# Altium PCB Smart_Clock_Mainboard.PcbDoc
Units mil, origin at the board's own origin, x right, y up, seen from the top; angles counter-clockwise.
Board outline 3937.01 x 2559.06 mil, 2 copper layers (Top Layer, Bottom Layer); 76 components, 85 nets, 390 pads, 208 vias.
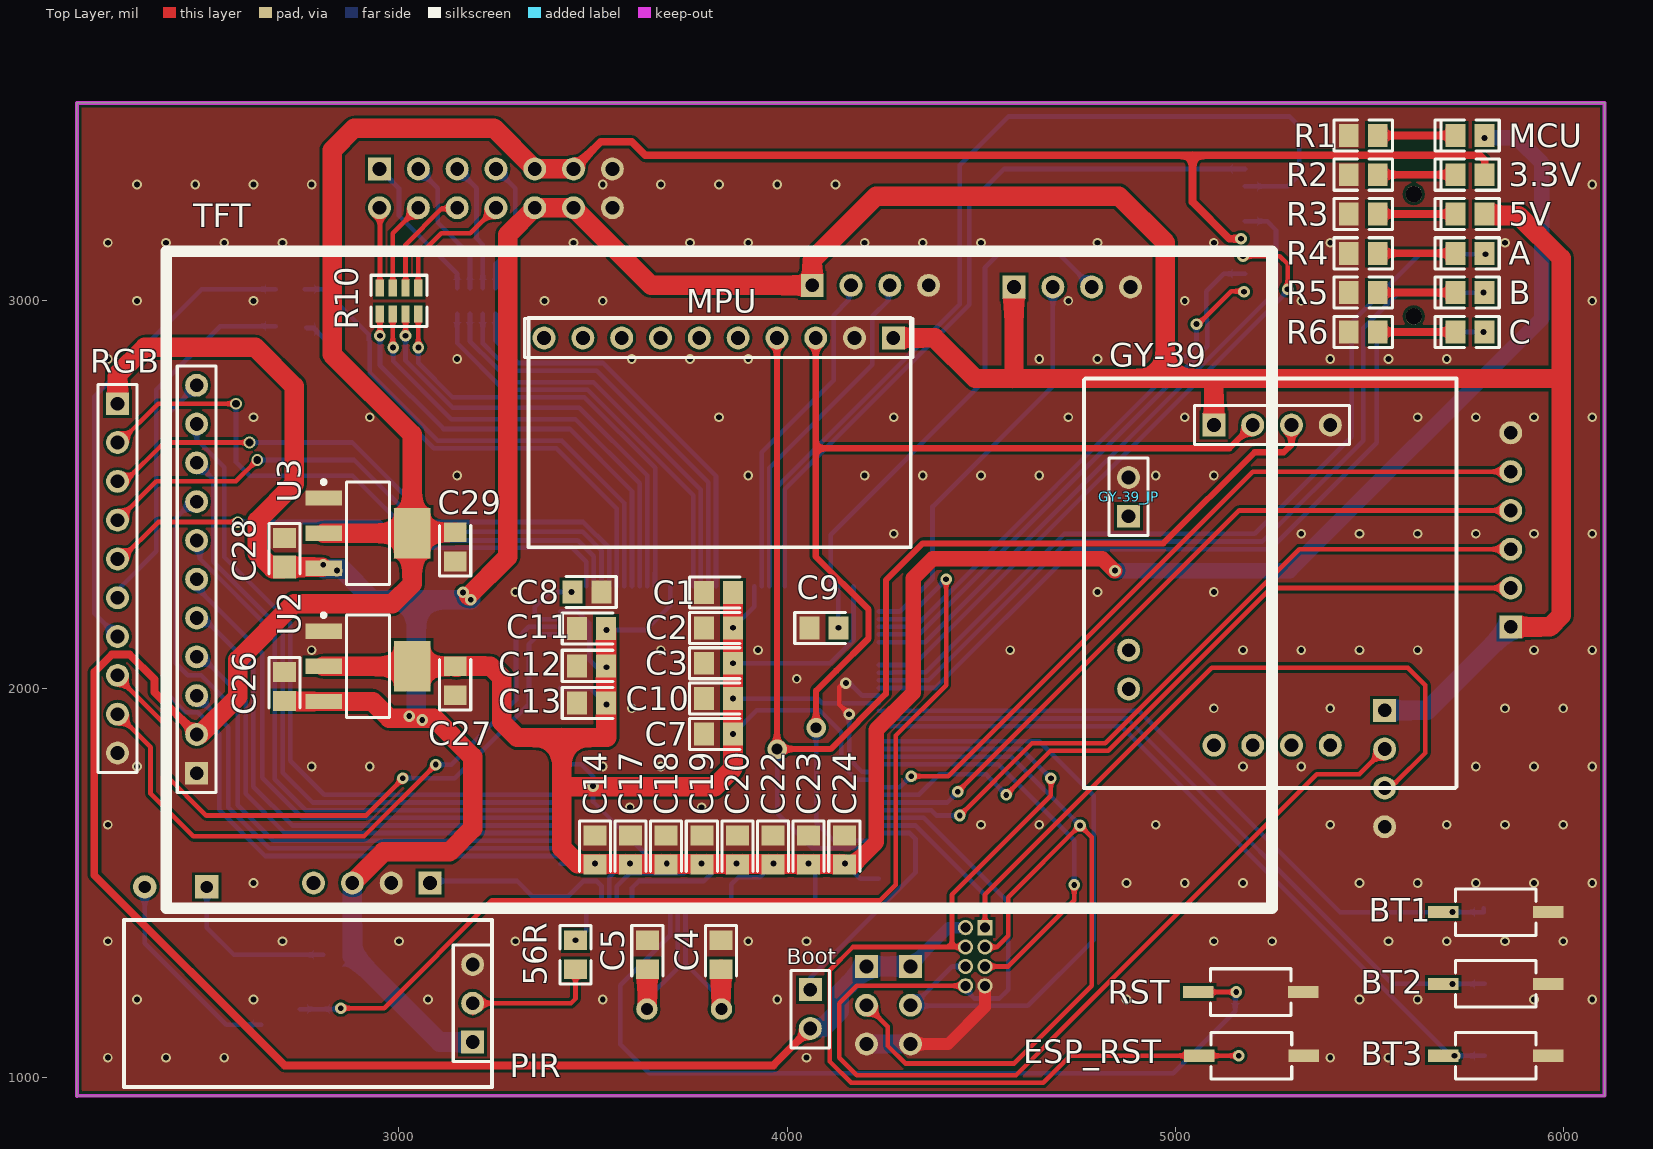
[diagram p0: Top Layer view]
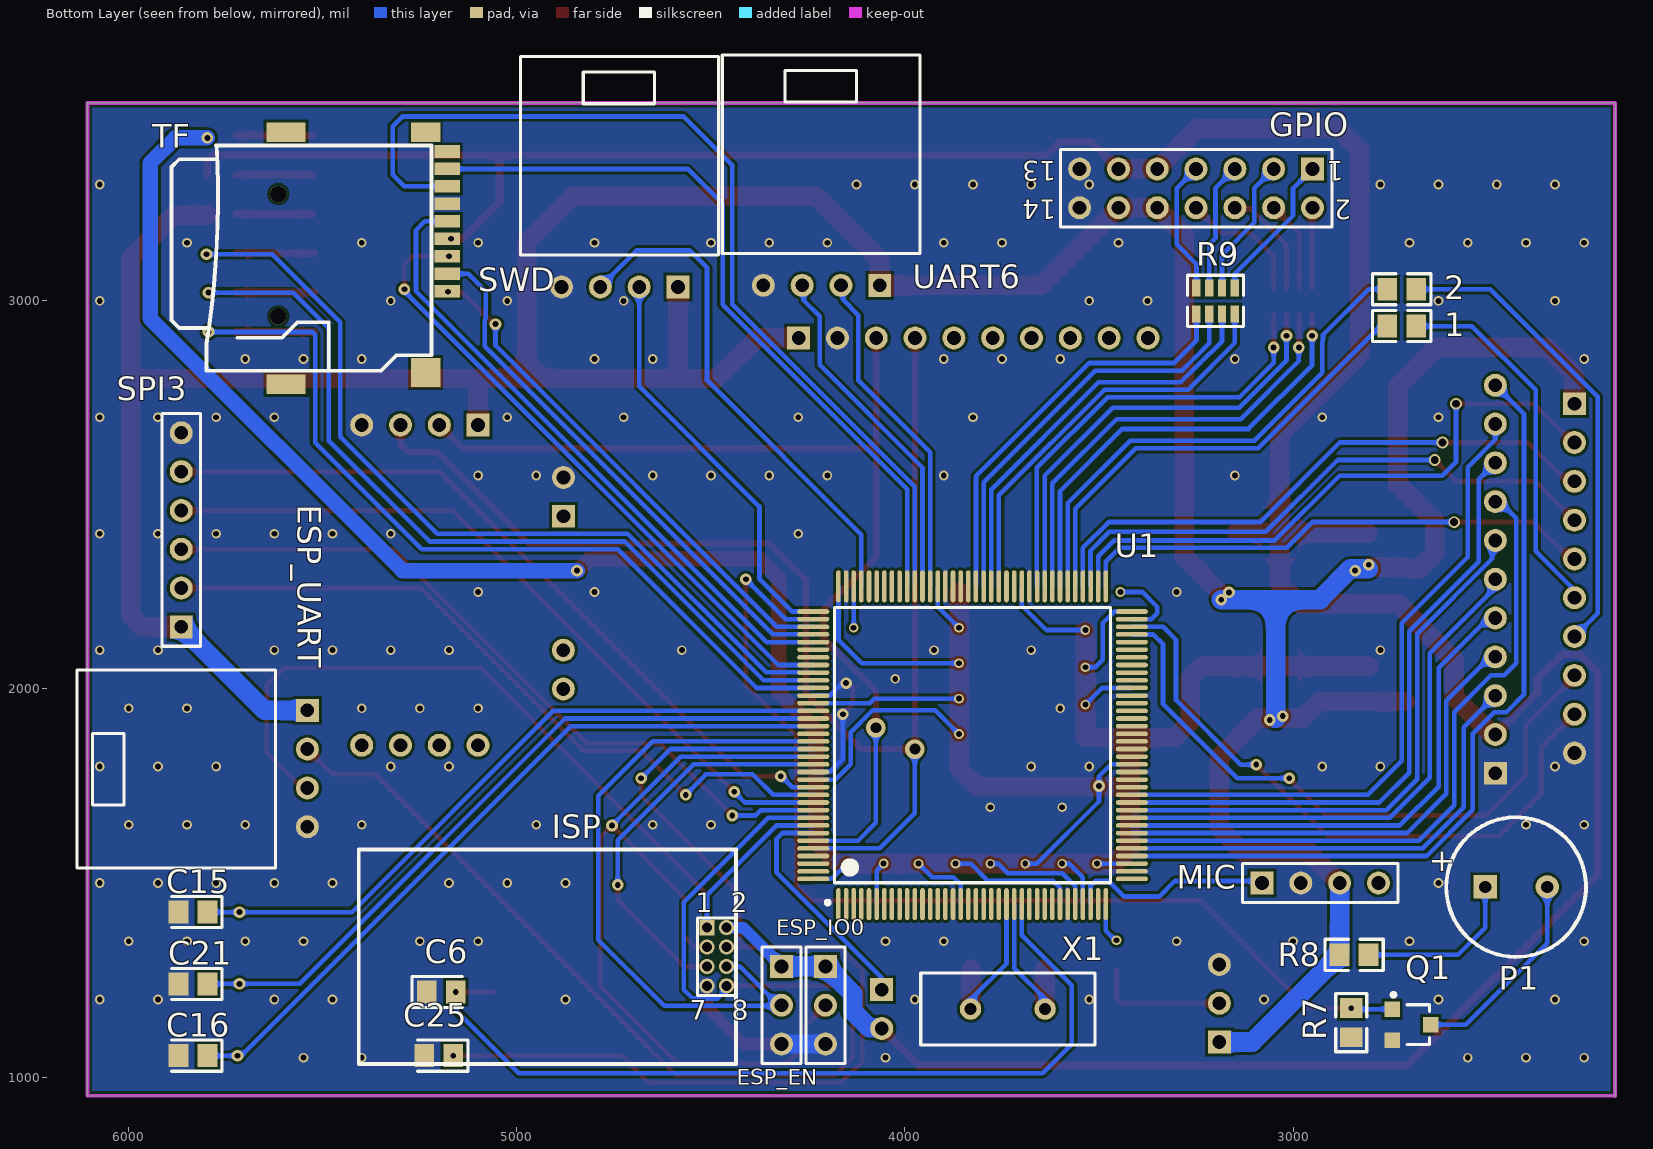
[diagram p1: Bottom Layer view, seen from below]
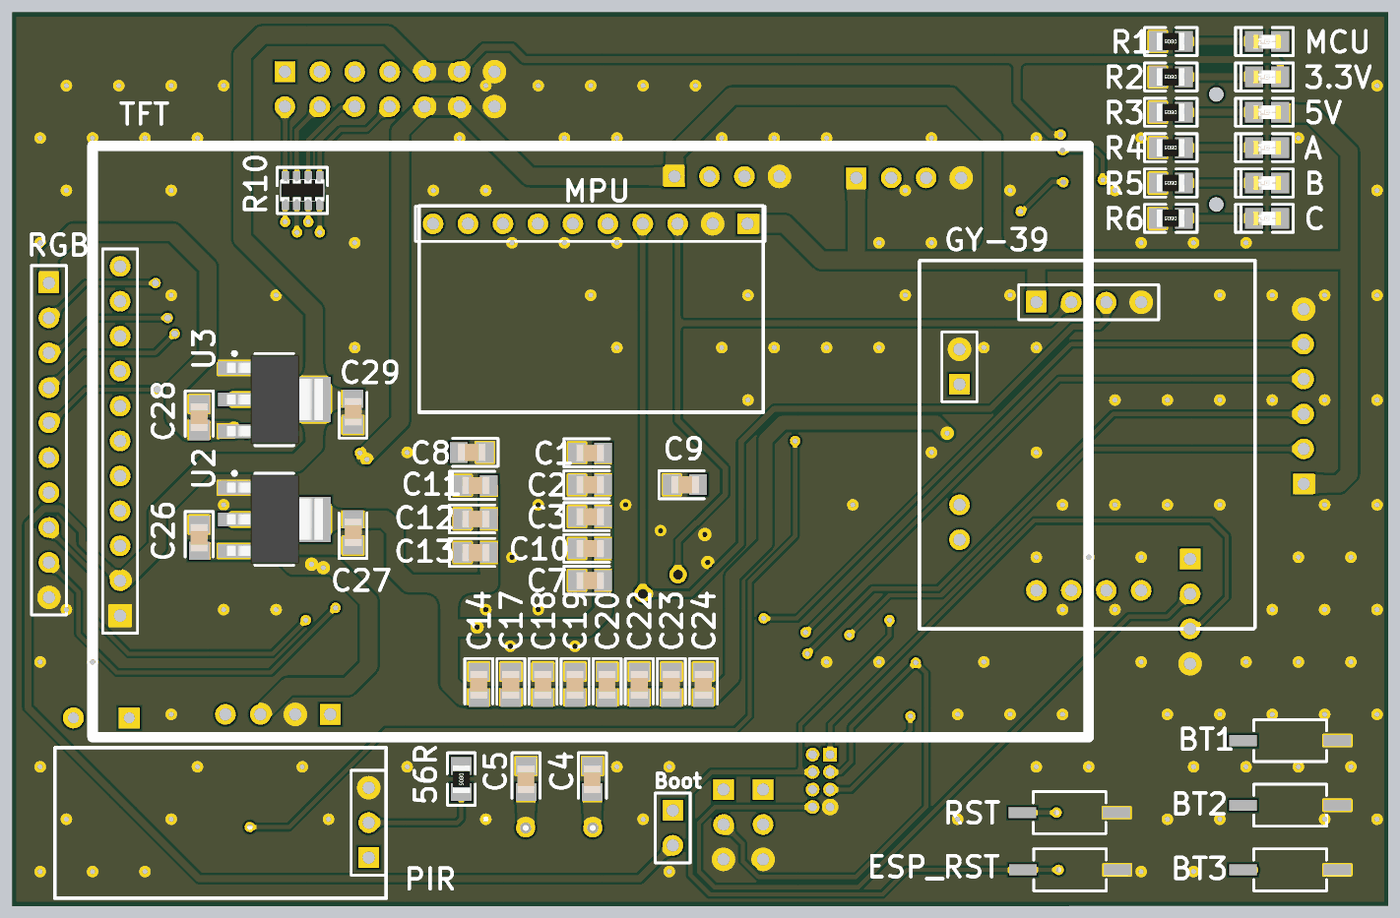
[diagram p2: 3D render of the assembled board from above, using the file's embedded part models]
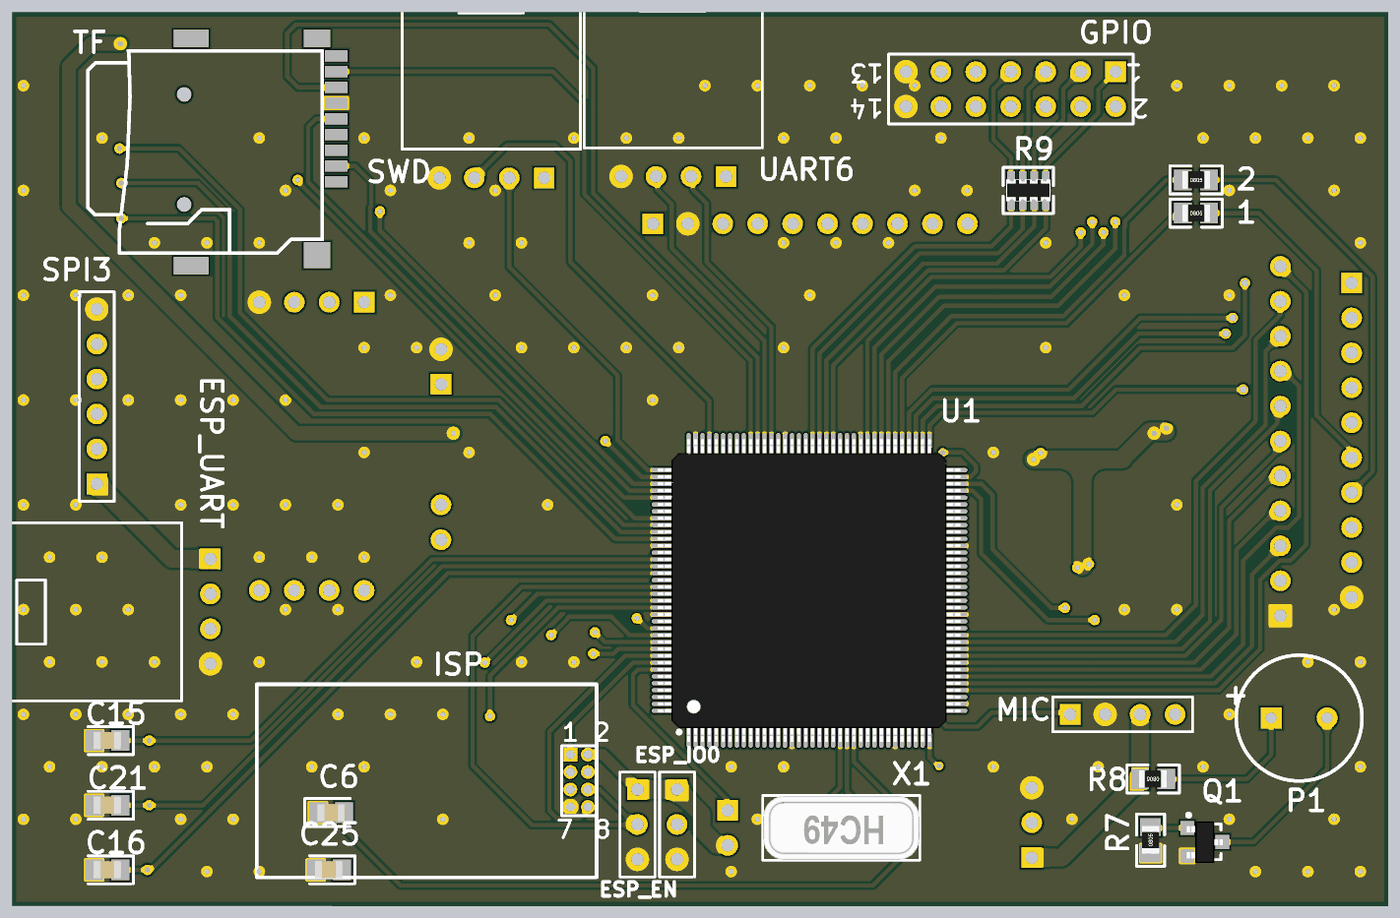
[diagram p3: 3D render of the assembled board from below, using the file's embedded part models]

## Layer stack, top to bottom
Top Solder: solder mask 0.4, Solder Resist, Dk 3.5
Top Layer: signal copper 1.4
Dielectric 1: dielectric 12.6, FR-4, Dk 4.8
Bottom Layer: signal copper 1.4
Bottom Solder: solder mask 0.4, Solder Resist, Dk 3.5

## Board outline
2170,950.94 2170,3510 6107.01,3510 6107.01,951.89

## Design rules (kind name [scope] priority, off if disabled: settings)
AssemblyTestPointUsage [All] p1 off:
AssemblyTestpoint [All] p1 off: testpointundercomponent=TRUE minsize=40 maxsize=100 preferedsize=60 minholesize=0 maxholesize=40 preferedholesize=32 testpointgrid=1 usegrid=TRUE gridtolerance=0.01 allowsidetop=TRUE allowsidebottom=TRUE
Clearance [All] p1: gap=7 ignorepadtopadclearanceinfootprint=FALSE except(0: Arc-Hole Track-Hole SMDPad-Hole THPad-Hole Via-Hole Fill-Hole Poly-Hole Region-Hole Text-Hole)
ComponentClearance [All] p1 off: gap=10 collisioncheckmode=3 verticalgap=10 showdistances=FALSE
DiffPairsRouting [All] p1 off: maxlimit=10 minlimit=10 mostfreqgap=10 toplayer_minwidth=15 toplayer_maxwidth=15 toplayer_prefwidth=15 bottomlayer_minwidth=15 bottomlayer_maxwidth=15 bottomlayer_prefwidth=15 maxuncoupledlength=500
FabricationTestPointUsage [All] p1 off: valid=0 allowmultiple=FALSE
FabricationTestpoint [All] p1 off: side=3 testpointundercomponent=TRUE minsize=40 maxsize=100 preferedsize=60 minholesize=0 maxholesize=40 preferedholesize=32 testpointgrid=1 allowsidetop=TRUE allowsidebottom=TRUE usegrid=TRUE gridtolerance=0.01
FanoutControl Fanout_BGA [IsBGA] p1 off: bgadir=Out bgaviamode=Centered fanoutstyle=Auto fanoutdirection=Alternating viagrid=1 // Fanout_BGA (Default Rule)
FanoutControl Fanout_LCC [IsLCC] p2 off: bgadir=Out bgaviamode=Centered fanoutstyle=Auto fanoutdirection=Alternating viagrid=1 // Fanout_LCC (Default Rule)
FanoutControl Fanout_SOIC [IsSOIC] p3 off: bgadir=Out bgaviamode=Centered fanoutstyle=Auto fanoutdirection=Alternating viagrid=1 // Fanout_SOIC (Default Rule)
FanoutControl Fanout_Small [(CompPinCount < 5)] p4 off: bgadir=Out bgaviamode=Centered fanoutstyle=Auto fanoutdirection=OutThenIn viagrid=1 // Fanout_Small (Default Rule)
FanoutControl Fanout_Default [All] p5 off: bgadir=Out bgaviamode=Centered fanoutstyle=Auto fanoutdirection=Alternating viagrid=1 // Fanout_Default (Default Rule)
Height [All] p1 off: minheight=0 maxheight=1000 prefheight=500
HoleSize [All] p1: absolutevalues=TRUE maxlimit=9999 minlimit=0.5 maxpercent=80.000 minpercent=20.000
HoleToHoleClearance [All] p1 off: gap=10 allowstackedmicrovias=FALSE
LayerPairs [All] p1 off: enforce=TRUE
MinimumSolderMaskSliver [All] p1 off: minsoldermaskwidth=10
NetAntennae [All] p1 off: netantennaetolerance=0
PasteMaskExpansion [All] p1 off: expansion=0
PlaneClearance [All] p1 off: clearance=20
PlaneConnect [All] p1 off: planeconnectstyle=Relief reliefexpansion=20 reliefentries=4 reliefconductorwidth=10 reliefairgap=10
PolygonConnect PolygonConnect_3 [All vs IsNamedPolygon('Top Layer-GND')] p1: connectstyle=Direct reliefconductorwidth=10 reliefentries=4 polygonreliefangle="90 Angle" airgapwidth=10
PolygonConnect PolygonConnect_2 [All vs IsNamedPolygon('Top Layer-GND')] p2: thpad.connectstyle=Direct thpad.reliefconductorwidth=10 thpad.reliefentries=4 thpad.polygonreliefangle="90 Angle" thpad.airgapwidth=0 smdpad.connectstyle=Direct smdpad.reliefconductorwidth=10 smdpad.reliefentries=4 smdpad.polygonreliefangle="90 Angle" smdpad.airgapwidth=10 via.connectstyle=Relief via.reliefconductorwidth=10 via.reliefentries=4 via.polygonreliefangle="90 Angle" via.airgapwidth=10
PolygonConnect PolygonConnect_1 [All vs IsNamedPolygon('Top Layer-GND')] p3: thpad.connectstyle=Direct thpad.reliefconductorwidth=10 thpad.reliefentries=4 thpad.polygonreliefangle="90 Angle" thpad.airgapwidth=10 smdpad.connectstyle=Direct smdpad.reliefconductorwidth=10 smdpad.reliefentries=4 smdpad.polygonreliefangle="90 Angle" smdpad.airgapwidth=10 via.connectstyle=Relief via.reliefconductorwidth=10 via.reliefentries=4 via.polygonreliefangle="90 Angle" via.airgapwidth=10
PolygonConnect [All] p4: connectstyle=Relief reliefconductorwidth=10 reliefentries=4 polygonreliefangle="90 Angle" airgapwidth=10
RoutingCorners [All] p1 off: cornerstyle=45-Degree minsetback=100 maxsetback=100
RoutingLayers [All] p1 off: top layer_v5=TRUE bottom layer_v5=TRUE
RoutingPriority [All] p1 off: routingpriority=0
RoutingTopology [All] p1 off: topology=Shortest
RoutingVias [All] p1 off: holewidth=28 width=50 viastyle="Through Hole" minholewidth=28 minwidth=50 maxholewidth=28 maxwidth=50
SilkToSilkClearance [All] p1 off: silktosilkclearance=10
SilkToSolderMaskClearance [IsPad] p1 off: minsilkscreentomaskgap=10 clearancetoexposedcopper=TRUE
SolderMaskExpansion [All] p1 off: expansion=4
UnRoutedNet [All] p1: checkbadconnections=TRUE
Width [All] p1: maxlimit=9999 minlimit=7 preferedwidth=10 minimp=50.000000 maximp=50.000000 favimp=50.000000
3 further rules are at their usual default settings.

## Components (designator, comment, footprint, x,y, rotation, side; value= is the part's Value field where it differs from the comment)
1 "56R" CR2012-0805 2720,2935 r180 bottom
2 "56R" CR2012-0805 2720,3030 r180 bottom
3.3V "LED" D0805 5760.35,3325.09 r180 top (schematic designator D2)
5V "LED" D0805 5760.35,3223.82 r180 top (schematic designator D3)
56R "Res Semi" CR2012-0805 3455,1315 r270 top
A "LED" D0805 5760.35,3122.55 r180 top (schematic designator D4)
B "LED" D0805 5760.35,3021.27 r180 top (schematic designator D5)
Boot "Boot" HDR1X2 4060,1225 r270 top
BT1 "B1" "PUSH SWITCH 2-PIN" 5826.43,1424.97 r270 top
BT2 "B2" "PUSH SWITCH 2-PIN" 5826.43,1239.97 r270 top
BT3 "B3" "PUSH SWITCH 2-PIN" 5826.43,1054.97 r270 top
C "LED" D0805 5760.35,2920 r180 top (schematic designator D6)
C1 "2.2uF" CC2012-0805#1 3823.39,2248.75 r0 top
C2 "100nF" CC2012-0805#1 3823.39,2157.5 r0 top
C3 "100nF" CC2012-0805#1 3823.39,2066.25 r0 top
C4 "20nF" CC2012-0805#1 3830,1315 r270 top
C5 "20nF" CC2012-0805#1 3640,1315 r270 top
C6 "100nF" CC2012-0805#1 5195,1218.94 r180 bottom
C7 "100nF" CC2012-0805#1 3823.39,1883.75 r0 top
C8 "2.2uF" CC2012-0805#1 3485,2250 r180 top
C9 "2.2uF" CC2012-0805#1 4095,2157.5 r0 top
C10 "100nF" CC2012-0805#1 3823.39,1975 r0 top
C11 "100nF" CC2012-0805#1 3495.82,2155.76 r0 top
C12 "100nF" CC2012-0805#1 3495.82,2059.64 r0 top
C13 "100nF" CC2012-0805#1 3495.82,1963.52 r0 top
C14 "100nF" CC2012-0805#1 3505,1585 r270 top
C15 "100nF" CC2012-0805#1 5835,1425 r0 bottom
C16 "100nF" CC2012-0805#1 5835,1055 r0 bottom
C17 "100nF" CC2012-0805#1 3596.8,1585 r270 top
C18 "100nF" CC2012-0805#1 3688.6,1585 r270 top
C19 "100nF" CC2012-0805#1 3780.4,1585 r270 top
C20 "100nF" CC2012-0805#1 3872.2,1585 r270 top
C21 "100nF" CC2012-0805#1 5835,1240 r0 bottom
C22 "100nF" CC2012-0805#1 3964,1585 r270 top
C23 "100nF" CC2012-0805#1 4055.8,1585 r270 top
C24 "100nF" CC2012-0805#1 4147.6,1585 r270 top
C25 "100nF" CC2012-0805#1 5201.42,1055 r0 bottom
C26 "10uF" CC2012-0805#1 2705,2005.9 r270 top
C27 "10uF" CC2012-0805#1 3145,2021.26 r90 top
C28 "10uF" CC2012-0805#2 2705,2351.26 r270 top
C29 "10uF" CC2012-0805#1 3145,2366.26 r90 top
ESP_EN "ESP_EN" HDR1X3 4318.27,1285 r270 bottom
ESP_IO0 "ESP_IO0" HDR1X3 4205,1285 r270 bottom
ESP_RST "ESP_RST" "PUSH SWITCH 2-PIN" 5196.59,1055 r270 top
ESP_UART "ESP_UART" LOCKEDHDR-4W 5540,1795 r270 bottom
GPIO "ISP" HDR2X7 2949.53,3340.48 r0 bottom
GY-39 "CONN0M" HDR1X4 5100,2680 r0 top
GY-39_JP "MOTOR" HDR1X2 4880.2,2445.11 r90 top
ISP "ISP" HDR1.27_2x4 4510,1385 r180 bottom
MCU "LED" D0805 5760.35,3426.36 r180 top (schematic designator D1)
MIC "Header 4" HDR1X4 3080,1500 r180 bottom
MPU "Header10" HDR1X10 4274,2904.61 r180 top
P1 "Buzzer" BUZ-9.0 2425,1490 r180 bottom
PIR "PIR" HDR1X3 3190,1090 r90 top
Q1 "AO3400" SO-G3/Z3.3 2695,1135 r270 bottom
R1 "330R" CR2012-0805 5485,3426.36 r180 top
R2 "330R" CR2012-0805 5485,3325.09 r180 top
R3 "330R" CR2012-0805 5485,3223.82 r180 top
R4 "330R" CR2012-0805 5485,3122.55 r180 top
R5 "330R" CR2012-0805 5485,3021.27 r180 top
R6 "330R" CR2012-0805 5485,2920 r180 top
R7 "10k" CR2012-0805 2850,1140 r90 bottom
R8 "33R" CR2012-0805 2842.6,1315 r0 bottom
R9 "56R" ARC241-0603x4 3200,3000 r90 bottom
R10 "56R" ARC241-0603x4 3000,3000 r90 top
RGB "Header 10" HDR1X10 2275,2735 r270 top
RST "RESET" "PUSH SWITCH 2-PIN" 5195,1218.94 r90 top
SPI3 "SPI3" HDR1X6 5865,2160 r90 bottom
SWD "Header 4" LOCKEDHDR-4W 4735,3036 r0 bottom
TF "TF CD Socket" SD-502774-0811 5180,3385 r270 bottom
TFT "TFT" HDR1X11 2478.74,1782.68 r90 top
U1 "STM32F407ZET6" LQFP144_M 3825,1855 r90 bottom locked
U2 "LM1117MP-3.3" MP04A_N 2920,2058.3 r0 top
U3 "LM1117MP-3.3" MP04A_N 2920,2401.26 r0 top
UART6 "UART6" LOCKEDHDR-4W 4215,3040 r0 bottom
X1 "8.00MHz" BCY-W2/E4.7 3735,1175.03 r0 bottom

## Footprints (in the part's own frame and the unit in brackets; to place one, negate y for a bottom-side part, rotate by r counter-clockwise, add the part's x,y. Pads: shape width x height; smd on the part's side, far side on the other; paste and mask are expansions set on the pad)
ARC241-0603x4 [mm] "Chip Resistor Array; Body 1.6 x 0.8 x 4 mm (LxW typ)"
  rect 1.1x0.55 smd: 1(-0.864,1.245) 2(0.838,1.245) 3(-0.864,0.406) 4(0.838,0.406) 5(-0.864,-0.432) 6(0.838,-0.432) 7(-0.864,-1.27) 8(0.838,-1.27)
  silkscreen extent -1.68,-1.83 1.68,1.83, body extent -0.79,-1.6 0.81,1.6, height 0.55
BCY-W2/E4.7 [mm]
  round 1.4 hole 0.8: 1(-2.44,-0.002) 2(2.44,-0.002)
  silkscreen extent -5.7,-2.35 5.7,2.35, body extent -5.67,-2.32 5.68,2.33, height 3.6
BUZ-9.0 [mil]
  rect 60x60 hole 31.5: 1(-80,0)
  round 60 hole 31.5: 2(80,0)
  silkscreen extent -180,-180 180,179
CC2012-0805#1 [mm] "Chip Capacitor; Body 2.0 x 1.2 mm (LxW typ)"
  rect 1.3x1.5 smd: 1(-0.95,0) 2(0.95,0)
  silkscreen extent -1.91,-1.02 1.4,1.02, body extent -0.99,-0.64 1.01,0.62, height 0.58
CC2012-0805#2 [mm] "Chip Capacitor; Body 2.0 x 1.2 mm (LxW typ)"
  rect 1.3x1.5 smd: 1(-0.95,0)
  rect 1.5x1.5 smd: 2(0.95,0)
  silkscreen extent -1.91,-1.02 1.4,1.02, body extent -0.99,-0.64 1.01,0.62, height 0.58
CR2012-0805 [mm] "Chip Resistor; Body 2.0 x 1.3 mm (LxW typ)"
  rect 1.3x1.5 smd: 1(-0.95,0) 2(0.95,0)
  silkscreen extent -1.91,-1.02 1.91,1.02, body extent -0.98,-0.62 1.02,0.63, height 0.58
D0805 [mm]
  rect 1.3x1.5 smd: 1(-0.95,0) 2(0.95,0)
  silkscreen extent -1.91,-1.02 2.3,1.02, body extent -0.98,-0.49 1.02,0.51, height 0.48
HDR1.27_2x4 [mm] "DIP Socket (M) 1.27mm"
  rect 1x1 hole 0.65: 1(0,0)
  round 1 hole 0.65: 2(1.27,0) 3(0,-1.27) 4(1.27,-1.27) 5(0,-2.54) 6(1.27,-2.54) 7(0,-3.81) 8(1.27,-3.81)
  silkscreen extent -0.64,-4.44 1.91,0.64
HDR1X2 [mm] "Connector; Header; 3 Position"
  rect 1.5x1.5 hole 0.9: 1(0,0)
  round 1.5 hole 0.9: 2(2.54,0)
  silkscreen extent -1.27,-1.27 3.81,1.27
HDR1X3 [mm] "Connector; Header; 3 Position"
  rect 1.5x1.5 hole 0.9: 1(0,0)
  round 1.5 hole 0.9: 2(2.54,0) 3(5.08,0)
  silkscreen extent -1.27,-1.27 6.35,1.27
HDR1X4 [mm] "Connector; Header; 4 Position"
  rect 1.5x1.5 hole 0.9: 1(0,0)
  round 1.5 hole 0.9: 2(2.54,0) 3(5.08,0) 4(7.62,0)
  silkscreen extent -1.27,-1.27 8.89,1.27
HDR1X6 [mm] "Connector; Header; 4 Position"
  rect 1.5x1.5 hole 0.9: 1(0,0)
  round 1.5 hole 0.9: 2(2.54,0) 3(5.08,0) 4(7.62,0) 5(10.16,0) 6(12.7,0)
  silkscreen extent -1.27,-1.27 13.97,1.27
HDR1X10 [mm] "Connector; Header; 10 Position"
  rect 1.5x1.5 hole 0.9: 1(0,0)
  round 1.5 hole 0.9: 2(2.54,0) 3(5.08,0) 4(7.62,0) 5(10.16,0) 6(12.7,0) 7(15.24,0) 8(17.78,0) 9(20.32,0) 10(22.86,0)
  silkscreen extent -1.27,-1.27 24.13,1.27
HDR1X11 [mm] "Connector; Header; 11 Position"
  rect 1.5x1.5 hole 0.9: 1(0,0)
  round 1.5 hole 0.9: 2(2.54,0) 3(5.08,0) 4(7.62,0) 5(10.16,0) 6(12.7,0) 7(15.24,0) 8(17.78,0) 9(20.32,0) 10(22.86,0) 11(25.4,0)
  silkscreen extent -1.27,-1.27 26.67,1.27
HDR2X7 [mm] "Connector; Header; 4 Position"
  rect 1.5x1.5 hole 0.9: 1(0.012,0.012)
  round 1.5 hole 0.9: 2(0.012,2.552) 3(2.552,0.012) 4(2.552,2.552) 5(5.092,0.012) 6(5.092,2.552) 7(7.632,0.012) 8(7.632,2.552) 9(10.172,0.012) 10(10.172,2.552) 11(12.712,0.012) 12(12.712,2.552) 13(15.252,0.012) 14(15.252,2.552)
  silkscreen extent -1.26,-1.26 16.51,3.82
LOCKEDHDR-4W [mm] "5-pin header with lock"
  rect 1.5x1.5 hole 0.9: 1(-3.81,0)
  round 1.5 hole 0.9: 2(-1.27,0) 3(1.27,0) 4(3.81,0)
  silkscreen extent -6.45,-15.09 6.5,-2.08
LQFP144_M [mm] "Thin QFP, 100-Leads, Body 14x14mm, Pitch 0.5mm, IPC Medium Density"
  oval 2.1x0.3 smd: 1(-10.4,8.8) 2(-10.4,8.3) 3(-10.4,7.8) 4(-10.4,7.3) 5(-10.4,6.8) 6(-10.4,6.3) 7(-10.4,5.8) 8(-10.4,5.3) 9(-10.4,4.8) 10(-10.4,4.3) 11(-10.4,3.8) 12(-10.4,3.3) 13(-10.4,2.8) 14(-10.4,2.3) 15(-10.4,1.8) 16(-10.4,1.3) 17(-10.4,0.8) 18(-10.4,0.3) 19(-10.4,-0.2) 20(-10.4,-0.7) 21(-10.4,-1.2) 22(-10.4,-1.7) 23(-10.4,-2.2) 24(-10.4,-2.7) 25(-10.4,-3.2) 26(-10.4,-3.7) 27(-10.4,-4.2) 28(-10.4,-4.7) 29(-10.4,-5.2) 30(-10.4,-5.7) 31(-10.4,-6.2) 32(-10.4,-6.7) 33(-10.4,-7.2) 34(-10.4,-7.7) 35(-10.4,-8.2) 36(-10.4,-8.7) 73(10.4,-8.7) 74(10.4,-8.2) 75(10.4,-7.7) 76(10.4,-7.2) 77(10.4,-6.7) 78(10.4,-6.2) 79(10.4,-5.7) 80(10.4,-5.2) 81(10.4,-4.7) 82(10.4,-4.2) 83(10.4,-3.7) 84(10.4,-3.2) 85(10.4,-2.7) 86(10.4,-2.2) 87(10.4,-1.7) 88(10.4,-1.2) 89(10.4,-0.7) 90(10.4,-0.2) 91(10.4,0.3) 92(10.4,0.8) 93(10.4,1.3) 94(10.4,1.8) 95(10.4,2.3) 96(10.4,2.8) 97(10.4,3.3) 98(10.4,3.8) 99(10.4,4.3) 100(10.4,4.8) 101(10.4,5.3) 102(10.4,5.8) 103(10.4,6.3) 104(10.4,6.8) 105(10.4,7.3) 106(10.4,7.8) 107(10.4,8.3) 108(10.4,8.8)
  oval 0.3x2.1 smd: 37(-8.75,-10.4) 38(-8.25,-10.4) 39(-7.75,-10.4) 40(-7.25,-10.4) 41(-6.75,-10.4) 42(-6.25,-10.4) 43(-5.75,-10.4) 44(-5.25,-10.4) 45(-4.75,-10.4) 46(-4.25,-10.4) 47(-3.75,-10.4) 48(-3.25,-10.4) 49(-2.75,-10.4) 50(-2.25,-10.4) 51(-1.75,-10.4) 52(-1.25,-10.4) 53(-0.75,-10.4) 54(-0.25,-10.4) 55(0.25,-10.4) 56(0.75,-10.4) 57(1.25,-10.4) 58(1.75,-10.4) 59(2.25,-10.4) 60(2.75,-10.4) 61(3.25,-10.4) 62(3.75,-10.4) 63(4.25,-10.4) 64(4.75,-10.4) 65(5.25,-10.4) 66(5.75,-10.4) 67(6.25,-10.4) 68(6.75,-10.4) 69(7.25,-10.4) 70(7.75,-10.4) 71(8.25,-10.4) 72(8.75,-10.4) 109(8.75,10.45) 110(8.25,10.45) 111(7.75,10.45) 112(7.25,10.45) 113(6.75,10.45) 114(6.25,10.45) 115(5.75,10.45) 116(5.25,10.45) 117(4.75,10.45) 118(4.25,10.45) 119(3.75,10.45) 120(3.25,10.45) 121(2.75,10.45) 122(2.25,10.45) 123(1.75,10.45) 124(1.25,10.45) 125(0.75,10.45) 126(0.25,10.45) 127(-0.25,10.45) 128(-0.75,10.45) 129(-1.25,10.45) 130(-1.75,10.45) 131(-2.25,10.45) 132(-2.75,10.45) 133(-3.25,10.45) 134(-3.75,10.45) 135(-4.25,10.45) 136(-4.75,10.45) 137(-5.25,10.45) 138(-5.75,10.45) 139(-6.25,10.45) 140(-6.75,10.45) 141(-7.25,10.45) 142(-7.75,10.45) 143(-8.25,10.45) 144(-8.75,10.45)
  silkscreen extent -10.42,-9 9,9.63, body extent -11,-10.95 11,11.05, height 1.6
MP04A_N [mm] "SOT223, 4-Leads, Body 6.5x3.5mm, Pitch 2.3mm, Lead Span 7mm, IPC Medium Density"
  rect 2.4x1 smd: 1(-2.9,2.3) 2(-2.9,0) 3(-2.9,-2.3)
  rect 2.4x3.3 smd: 4(2.9,0)
  silkscreen extent -3.02,-3.35 1.4,3.47, body extent -3.43,-3.24 3.53,3.26, height 1.66
"PUSH SWITCH 2-PIN" [mm]
  rect 0.8x2 smd: 1(-0.001,-3.425) 2(-0.001,3.425)
  silkscreen extent -1.52,-2.64 1.52,2.64
SD-502774-0811 [mil] "MOLEX SD Memory Card Connector"
  round 42.5 hole 42.5 unplated: 0(110,-435) 0(425,-435)
  rect 32.5x66 smd: 1(360,0) 2(315,0) 3(270,0) 4(225,0) 5(180,0) 6(135,0) 7(90,0) 8(45,0) 9(0,0)
  rect 50x100 smd: 10(-50,-415) 10(600,-415)
  rect 50x75 smd: 10(-50,-55)
  rect 75x75 smd: 10(570,-55)
  silkscreen extent -15,-710 565,-40
SO-G3/Z3.3 [mil]
  rect 40x40 smd: 1(-40,-50) 2(40,-50) 3(0,50)
  silkscreen extent -82,-51 51,46, body extent -58,-52 60,52, height 43

## Part data
1 2 R1 R2 R3 R4 R5 R6 R7 R8: library part "Res Semi", "Semiconductor Resistor", LatestRevisionDate=17-Jul-2002, LatestRevisionNote="Re-released for DXP Platform.", Published=8-Jun-2000, Publisher="Altium Limited"
3.3V 5V A B C MCU: "Typical RED GaAs LED", LatestRevisionDate=08-Jul-2005, LatestRevisionNote="Mech Layer 1 removed.", PackageReference=LED-1, Published=8-Jun-2000, Publisher="Altium Limited"
56R: "Semiconductor Resistor", LatestRevisionDate=17-Jul-2002, LatestRevisionNote="Re-released for DXP Platform.", Published=8-Jun-2000, Publisher="Altium Limited"
Boot GY-39_JP: library part "Header 2", "Header, 2-Pin", Publisher="Altium Limited", Revision="17-Jul-2002: Re-released for DXP Platform."
BT1 BT2 BT3 ESP_RST RST: library part SW-SPST, "Single-Pole, Single-Throw Switch", Published=24-Mar-1999, Publisher="Altium Limited", Revision="July-2002: Re-released for DXP Platform."
C1 C2 C3 C4 C5 C6 C7 C8 C9 C10 C11 C12 C13 C14 C15 C16 C17 C18 C19 C20 C21 C22 C23 C24 C25 C26 C27 C28 C29: library part "Cap Semi", "Capacitor (Semiconductor SIM Model)", LatestRevisionDate=17-Jul-2002, LatestRevisionNote="Re-released for DXP Platform.", PackageReference=C1206, Published=8-Jun-2000, Publisher="Altium Limited"
ESP_EN ESP_IO0 PIR: library part "Header 3", "Header, 3-Pin", Publisher="Altium Limited", Revision="17-Jul-2002: Re-released for DXP Platform."
ESP_UART GY-39 UART6: library part "Header 4", "Header, 4-Pin", Publisher="Altium Limited", Revision="17-Jul-2002: Re-released for DXP Platform."
GPIO: library part "Header 7X2", "Header, 7-Pin, Dual row", Publisher="Altium Limited", Revision="17-Jul-2002: Re-released for DXP Platform."
ISP: library part "Header 4X2", "Header, 5-Pin, Dual row", Publisher="Altium Limited", Revision="17-Jul-2002: Re-released for DXP Platform."
MIC SWD: "Header, 4-Pin", Publisher="Altium Limited", Revision="17-Jul-2002: Re-released for DXP Platform."
MPU: library part "Header 10", "Header, 10-Pin", LatestRevisionDate=17-Jul-2002, LatestRevisionNote="Re-released for DXP Platform.", Publisher="Altium Limited"
Q1: "N-Channel MOSFET", Published=8-Jun-2000, Publisher="Altium Limited", Revision="July-2002: Re-released for DXP Platform."
R9 R10: library part "Res Array", "4x Resistor Array", LatestRevisionDate=17-Jul-2002, LatestRevisionNote="Re-released for DXP Platform.", Published=8-Jun-2000, Publisher="Altium Limited"
RGB: "Header, 10-Pin", LatestRevisionDate=17-Jul-2002, LatestRevisionNote="Re-released for DXP Platform.", Publisher="Altium Limited"
SPI3: library part "Header 6", "Header, 6-Pin", LatestRevisionDate=17-Jul-2002, LatestRevisionNote="Re-released for DXP Platform.", Publisher="Altium Limited"
TF: "TF Card Socket with Spring with Card Detection"
TFT: library part "Header 11", "Header, 11-Pin", LatestRevisionDate=17-Jul-2002, LatestRevisionNote="Re-released for DXP Platform.", Publisher="Altium Limited"
U1: "STM32 ARM-based 32-bit MCU with 64 Kbytes Flash, 144-pin LQFP, Industrial Temperature", ComponentLink1Description="Manufacturer Link", ComponentLink1URL=www.st.com/stm32, ComponentLink2Description=Datasheet, ComponentLink2URL=http://www.st.com/stonline/products/literature/ds/13587.pdf, DatasheetVersion="rev6, Mar-2008", PackageDescription="100-Pin Low-Profile Quad Flat Pack, 14 x 14 mm Body, 0.5 mm Pitch (LQFP100)", PackageReference=LQFP100, PackageVersion=Mar-2008, Published=30-May-2008, Publisher="Altium Limited"
U2 U3: "800mA Low-Dropout Linear Regulator", DigiKeyPartNumber=LM1117MP-3.3CT-ND, Manufacturer="National Semiconductor", PackageTopMarking=XYTT*N05A, Code_IPC=SOT223-4, Code_JEDEC=TO-261-AA, ComponentLink1Description="LM1117 Datasheet", ComponentLink1URL=http://www.national.com/ds/LM/LM1117.pdf, ComponentLink2Description="LM1117 Web Page", ComponentLink2URL=http://www.national.com/pf/LM/LM1117.html, ComponentLink3Description="MP04A Package Page", ComponentLink3URL=http://www.national.com/packaging/folders/mp04a.html, CompType="LDO IC", DatasheetVersion=Apr-2006, PackageDescription="Molded SOT-223, 6.50 x 3.56 x 1.6mm Body, 4 Lead, 2.3mm Pitch", PackageReference=MP04A, PackageVersion="revB, Apr-2003", PartNumber=LM1117MP-3.3, PinCount=4, Published=27-Nov-2008, Publisher="Altium Limited", RoHS=O
X1: library part XTAL, "Crystal Oscillator", Published=8-Jun-2000, Publisher="Altium Limited", Revision="July-2002: Re-released for DXP Platform."

## Free pads (board coordinates)
  round 59.06 hole 35.43: 1(5300.2,1855) 2(5200.2,1855) 3(5100.2,1855) 5(5400,1855) 6(4880.39,2100) 7(4880.39,2000)

## Via types
v1: diameter 25, hole 15, Top Layer to Bottom Layer, 163 vias
v2: diameter 30, hole 15, Top Layer to Bottom Layer, 39 vias
v3: diameter 30, hole 20, Top Layer to Bottom Layer, 4 vias
v4: diameter 50, hole 28, Top Layer to Bottom Layer, 2 vias

## Nets (pads, with @x,y where several pads share a name; then routed paths per layer and width w, separated by ;. In a path a pad name is that pad's centre, name@x,y a point inside that pad or via, vN(x,y) a via of type N, cw(c..) or ccw(c..) an arc to the next point about the centre after c; other vN are vias at no path point)
3.3V: 3.3V.1 Boot.2 C29.2 ESP_EN.1 ESP_IO0.1 GPIO.9 GPIO.11 ISP.2 TF.4 TFT.2 U3.2 U3.4 | length 9261.7
  Top Layer w20: TFT.2 2370,1991.42 2370,2025 2306.53,2088.47 2260,2088.47 2215,2043.47 2215,1520 2705,1030 3965,1030 Boot.2 ; GPIO.11 3520,3410 3600,3410 3635,3375 5045,3375 ; v2(5170,3160) 5140,3160 5045,3255 5045,3375 ; 3.3V.1 5797.75,3362.25 5785,3375 5045,3375
  Top Layer w50: TFT.2 2487.68,1882.68 2585,1980 2585,2075 2730,2220 2983.35,2220 3034.17,2270.83 U3.4 ; U3.2 U3.4 ; C29.2 3144.41,2403.07 3035.98,2403.07 U3.4 ; GPIO.11 GPIO.9 3245,3445 2885,3445 2827.75,3387.75 2827.75,2862.25 3034.17,2655.83 U3.4
  Bottom Layer w30: ESP_EN.1 4318.27,1287.03 4416.23,1385 ISP.2
  Bottom Layer w50: Boot.2 4061.73,1126.73 4091.73,1126.73 4135,1170 4135,1215 ESP_IO0.1 ESP_EN.1 ; ESP_IO0.1@4200.47,1272.87 ESP_IO0.1@4205,1277.4
5V: 5V.1 C26.2 C28.2 ESP_UART.1 GPIO.10 GPIO.12 GY-39.1 MIC.3 MPU.1 PIR.1 R8.2 RGB.1 SPI3.1 SWD.1 U2.3 U3.3 UART6.1 | length 10831.1
  Top Layer w16: U2.3@2804.45,1967.75 2800,1963.3 U2.3@2835,1963.3
  Top Layer w50: RGB.1 2274.94,2735.06 2274.94,2809.94 2345,2880 2630,2880 2730,2780 2730,2528.17 2635,2433.17 2635,2350 2675,2310 2701.14,2310 C28.2 U3.3@2802.68,2313.86 ; C26.2@2710.79,1967.75 U2.3@2804.45,1967.75 ; U2.3 2932.25,1967.75 2975,1925 3060,1925 3090,1925 3190,1825 3190,1640 3130,1580 2960,1580 MIC.3 ; v2@3180,2240 3280,2340 3280,3170 GPIO.10 GPIO.12 3650,3040 UART6.1 4065.06,3040.06 4065.06,3105.06 4230,3270 4855,3270 4975,3150 4975,2800 ; MPU.1 4380.39,2904.61 4485,2800 4580,2800 ; SWD.1 4585,2805 4580,2800 ; GY-39.1 5100,2795 ; 5V.1 5797.75,3220.59 5798.34,3220 5885,3220 5995,3110 5995,2800 5995,2189.29 5965.71,2160 SPI3.1 ; 5970,2800 5100,2800 5100,2795 ; 4580,2800 4975,2800 ; 4975,2800 5095,2800 5100,2795
  Bottom Layer w50: v2@2805.83,2310 2852.17,2310 2930,2232.17 2930,2230 3045,2230 ; MIC.3 R8.2 2880,1311.06 2880.59,1310.47 2884.53,1310.47 3105,1090 PIR.1 ; 3045,1923.9 3045,2230 ; v2(3185,2230) 3045,2230 ; ESP_UART.1 5650,1945 SPI3.1
  other v2: 3060,1920 3026.63,1930 3165,2248.75 2840,2305 2805,2320
BOOT0: Boot.1 U1.138 | length 601.9
  Bottom Layer w12: Boot.1 4060,1255.51 4331,1526.51 4331,1614 4316.38,1628.62 U1.138
BUTTON1: BT1.1 C15.1 U1.122 | length 1783.4
  Bottom Layer w12: U1.122 4906.42,1943.58 5425,1425 v2(5715,1425) 5795.03,1425 C15.1@5795.03,1434.97
BUTTON2: BT2.1 C21.1 U1.123 | length 1844.5
  Bottom Layer w12: U1.123 4876.1,1923.9 5560,1240 C21.1
  other v2: 5715,1240
BUTTON3: BT3.1 C16.1 U1.124 | length 1912.9
  Bottom Layer w12: U1.124 4860.79,1904.21 5710,1055 C16.1
  other v2: 5720,1055
buzzer: Q1.1 R7.2 U1.110 | length 2725.3
  Top Layer w12: v2(2850,1177.4) 2961.81,1177.4 3239.41,1455 4240,1455 4280,1495 4280,1880 4410,2010 v2(4410,2282.68)
  Bottom Layer w12: Q1.1 2847.6,1175 v2(2850,1177.4) ; U1.110 4236.51,2179.9 4307.22,2179.9 v2(4410,2282.68)
ESP_EN: ESP_EN.2 ISP.6 U1.126 | length 1704.1
  Bottom Layer w12: U1.126 4650.16,1864.84 4790,1725 4790,1353.13 4620.18,1183.31 4319.95,1183.31 ESP_EN.2 ; ESP_EN.2@4318.27,1175 ESP_EN.2@4318.27,1177.4 ; ESP_EN.2@4325.87,1185 4425.87,1285 ISP.6
ESP_IO0: ESP_IO0.2 ISP.3 U1.128 | length 2205.1
  Top Layer w12: ESP_IO0.2 4260,1130 4260,1080 4305,1035 4585,1035 4785,1235 4785,1618.31 v2(4755,1648.31) 4570,1463.31 4570,1363.91 4540.9,1334.81 4510.19,1334.81 ISP.3
  Bottom Layer w12: U1.128 4577.83,1825.47 v2(4755,1648.31)
ESP_IO2: ISP.5 U1.129 | length 1040.2
  Top Layer w12: ISP.5 4570,1285 4740,1455 v2(4740,1495)
  Bottom Layer w12: U1.129 4236.51,1805.88 4544.12,1805.88 4740,1610 v2(4740,1495)
ESP_RST: C25.1 ESP_RST.1 ISP.4 U1.127 | length 2731
  Top Layer w12: ISP.4 4425,1335 ; v2(4680,1770) 4680,1725 4425,1470 4425,1335 ; v2(5164.02,1055) ESP_RST.1 4730.03,1055.03 4660,985 4165,985 4110,1040 4110,1275 4170,1335 4425,1335
  Bottom Layer w12: U1.127 4604.84,1845.16 v2(4680,1770)
ESP_RX: ESP_UART.3 ISP.1 U1.137 | length 2231.2
  Top Layer w12: ISP.1 4510,1470 5095,2055 5600,2055 5645,2010 5645,1835 5569.11,1759.11 5566.84,1759.11 5552.73,1745 ESP_UART.3
  Bottom Layer w12: U1.137 4330.31,1648.31 4331,1649 4510,1470 ISP.1
ESP_TX: ESP_UART.2 ISP.8 U1.136 | length 3025.2
  Top Layer w12: ISP.8 4180,1235 4135,1190 4135,1050 4180,1005 4590,1005 4739.38,1154.38 5365,1780 5475,1780 ESP_UART.2@5527.5,1832.5
  Bottom Layer w12: U1.136 4352,1668 4570,1450 4570,1225 4547.31,1202.31 4482.69,1202.31 4460,1225 ISP.8
GND: BT1.2 BT2.2 BT3.2 C1.1 C2.1 C3.1 C4.1 C5.1 C6.1 C7.1 C8.1 C9.1 C10.1 C11.1 C12.1 C13.1 C14.1 C15.2 C16.2 C17.1 C18.1 C19.1 C20.1 C21.2 C22.1 C23.1 C24.1 C25.2 C26.1 C27.1 C28.1 C29.1 ESP_EN.3 ESP_IO0.3 ESP_RST.2 ESP_UART.4 GPIO.13 GPIO.14 GY-39.4 GY-39_JP.2 ISP.7 MIC.2 MPU.2 PIR.3 Q1.2 R1.2 R2.2 R3.2 R4.2 R5.2 R6.2 R7.1 RGB.10 RST.1 SPI3.6 SWD.4 TF.6 TFT.1 U1.16 U1.31 U1.38 U1.51 U1.61 U1.83 U1.94 U1.107 U1.120 U1.130 U2.1 U3.1 UART6.4 | length 804
  Top Layer w12: v2(4151.77,2015) 4145,2015 4135,2005 4135,1960 v2(4160,1935)
  Top Layer w30: ESP_EN.3 4415,1085 4510,1180 ISP.7
  Bottom Layer w12: v2(4151.77,2015) 4161.89,2015 4193.93,1982.95 U1.120 ; v2(4160,1935) 4160,1820.04 4193.15,1786.88 4200.39,1786.88 4201.17,1786.1 U1.130
  Bottom Layer w50: ESP_IO0.3 ESP_EN.3
  other v1: 2250,1050 2400,1050 2550,1050 4050,1050 5400,1050 5550,1050 2325,1200 2625,1200 3075,1200 3525,1200 3975,1200 4875,1200 5475,1200 5625,1200 5925,1200 6075,1200 2250,1350 2700,1350 3000,1350 3300,1350 3900,1350 4050,1350 5100,1350 5250,1350 5550,1350 5700,1350 5850,1350 6000,1350 2625,1500 4875,1500 5025,1500 5175,1500 5475,1500 5625,1500 5775,1500 5925,1500 6075,1500 2250,1650 2400,1650 4500,1650 4650,1650 4950,1650 5400,1650 5700,1650 5850,1650 6000,1650 3595,1695 3780,1695 2325,1800 2775,1800 2925,1800 3525,1800 3675,1800 5175,1800 5325,1800 5775,1800 5925,1800 6075,1800 3600,1950 5100,1950 5250,1950 5400,1950 5850,1950 6000,1950 4025,2026.02 2775,2100 3675,2100 3925,2100 4575,2100 5175,2100 5325,2100 5475,2100 5625,2100 5925,2100 6075,2100 3300,2250 4800,2250 5100,2250 4275,2400 5325,2400 5475,2400 5625,2400 5775,2400 5925,2400 6075,2400 3150,2550 3900,2550 4200,2550 4350,2550 4500,2550 4650,2550 4950,2550 5100,2550 2625,2700 2925,2700 3825,2700 4275,2700 4725,2700 5025,2700 5625,2700 5775,2700 5925,2700 6075,2700 2250,2850 3150,2850 3600,2850 3750,2850 3900,2850 4650,2850 4800,2850 5400,2850 5550,2850 5700,2850 2325,3000 2625,3000 3375,3000 3525,3000 4725,3000 5025,3000 5325,3000 6075,3000 2250,3150 2400,3150 2550,3150 2700,3150 3450,3150 3750,3150 3900,3150 4200,3150 4350,3150 4500,3150 4800,3150 5100,3150 5400,3150 5850,3150 2325,3300 2475,3300 2625,3300 2775,3300 3525,3300 3675,3300 3825,3300 3975,3300 4125,3300 6075,3300
GPIO1: R9.7 U1.87 | length 1079.6
  Bottom Layer w12: R9.7 3150,2891.4 3270.4,2771 3485.87,2771 3758.07,2498.8 U1.87
GPIO2: R9.5 U1.88 | length 1072.1
  Bottom Layer w12: R9.5 3183,2896.4 3245.53,2833.87 3246.13,2833.87 3290,2790 3501.38,2790 3777.76,2513.63 U1.88
GPIO3: R9.3 U1.89 | length 1073.4
  Bottom Layer w12: R9.3 3216,2890.27 3253.4,2852.87 3254,2852.87 3286.87,2820 3510,2820 3797.44,2532.56 U1.89
GPIO4: R9.1 U1.90 | length 1065.2
  Bottom Layer w12: R9.1 3249,2896.87 3305.87,2840 3525,2840 3817.13,2547.87 U1.90
GPIO5: R10.1 U1.79 | length 1161
  Top Layer w12: v2(2951,2910) R10.1
  Bottom Layer w12: v2(2951,2910) 2951,2834 3115,2670 3440,2670 3600.59,2509.41 U1.79
GPIO6: R10.3 U1.80 | length 1152.6
  Top Layer w12: R10.3 2984,2881 v2(2985,2880)
  Bottom Layer w12: v2(2985,2880) 2985,2845 3135,2695 3455,2695 3620.28,2529.72 U1.80
GPIO7: R10.5 U1.81 | length 1151.1
  Top Layer w12: v2(3017,2910) R10.5
  Bottom Layer w12: v2(3017,2910) 3017,2846.13 3138.13,2725 3465,2725 3639.96,2550.04 U1.81
GPIO8: R10.7 U1.82 | length 1153.6
  Top Layer w12: v2(3050,2880) R10.7
  Bottom Layer w12: v2(3050,2880) 3050,2840 3138,2752 3478,2752 3660.12,2569.88 3660.12,2300.17 3659.65,2299.69 U1.82
GPIO_1: GPIO.1 R9.8 | length 389.8
  Bottom Layer w12: GPIO.1 3000,3290 3000,3220 3150,3070 R9.8
GPIO_2: GPIO.3 R9.6 | length 362.1
  Bottom Layer w12: GPIO.3 3100,3290 3100,3202.03 3183,3119.03 R9.6
GPIO_3: GPIO.5 R9.4 | length 334.3
  Bottom Layer w12: GPIO.5 3200,3290 3200,3161 3216,3145 R9.4
GPIO_4: GPIO.7 R9.2 | length 348.8
  Bottom Layer w12: R9.2 3249,3095 3300,3146 3300,3290 GPIO.7
GPIO_5: GPIO.2 R10.2 | length 207
  Top Layer w12: R10.2 GPIO.2@2951,3240
GPIO_6: GPIO.4 R10.4 | length 234.3
  Top Layer w12: R10.4 2984,3174 GPIO.4
GPIO_7: GPIO.6 R10.6 | length 284.4
  Top Layer w12: R10.6 3017,3145 3109.5,3237.5 3147.5,3237.5 GPIO.6
GPIO_8: GPIO.8 R10.8 | length 333.8
  Top Layer w12: R10.8 3050,3115 3109,3174 3184,3174 GPIO.8
I2C1_SCL: GY-39.2 MPU.3 U1.139 | length 2693.7
  Top Layer w16: MPU.3 4074,2620 ; v4(4075,1900) 4075,1995.86 4126.3,2047.16 4127.16,2047.16 4210,2130 4210,2205 4074,2341 4074,2620 ; GY-39.2 5140,2620 4074,2620
  Bottom Layer w12: v4(4075,1900) 4075,1655 4121.06,1608.94 U1.139
I2C1_SDA: GY-39.3 MPU.4 U1.140 | length 3391.4
  Top Layer w16: MPU.4 3974,1845.61 v4(3974.61,1845) 4112.43,1845 4255,1987.57 4255,2280 4350,2375 4970,2375 5205,2610 5280.2,2610 5300,2629.8 GY-39.3
  Bottom Layer w12: v4@3974.61,1840 3974.61,1679.65 4065,1589.25 U1.140
I2C2_SCL: RGB.8 U1.69 | length 1671.9
  Top Layer w12: RGB.8 2275,2030 2400,1905 2400,1777.03 2503.26,1673.77 2915,1673.77 3016.78,1775.55 3016.78,1776.91 v2(3009.87,1770)
  Bottom Layer w12: v2(3009.87,1770) 3143.9,1770 3335,1961.1 3335,2115 3360.34,2140.34 3415.46,2140.34 U1.69
I2C2_SDA: RGB.9 U1.70 | length 1656.2
  Top Layer w12: RGB.9 2360,1850 2360,1730 2470,1620 2910,1620 v2(3095,1805)
  Bottom Layer w12: v2(3095,1805) 3135,1805 3301.66,1971.66 3301.66,2127.19 3334.59,2160.12 U1.70
LED1: A.1 U1.117 | length 2182.9
  Bottom Layer w12: U1.117 4271.66,2042.01 4272.44,2042.79 4357.79,2042.79 4715,2400 5205,2400 5455,2650 5455,2945 5630,3120 v2(5800,3120)
LED2: B.1 U1.118 | length 2142.1
  Bottom Layer w12: U1.118 4364.55,2022.32 4722.23,2380 5225,2380 5485,2640 5485,2930 5576.27,3021.27 v2(5794.83,3021.27)
LED3: C.1 U1.119 | length 2101.3
  Bottom Layer w12: U1.119 4382.64,2002.64 4740,2360 5245.2,2360 5520,2634.8 5520,2912.97 5527.03,2920 v2(5794.83,2920)
mcu_3.3V: C1.2 C2.2 C3.2 C7.2 C10.2 C11.2 C12.2 C13.2 C14.2 C17.2 C18.2 C19.2 C20.2 C22.2 C23.2 C24.2 C27.2 MCU.1 U1.6 U1.17 U1.30 U1.32 U1.33 U1.39 U1.52 U1.62 U1.72 U1.84 U1.95 U1.108 U1.121 U1.131 U1.144 U2.2 U2.4 | length 10848
  Top Layer w40: v1(4149.49,1549.88) 4174.88,1549.88 4230,1605 4230,1895 4325,1990 4325,2285 4375,2335 4812.68,2335 4842.68,2305 v2(4845,2305)
  Top Layer w50: U2.2@2804.45,2058.3 U2.2 U2.4 3143.46,2058.3 3146.06,2055.7 C27.2@3150,2055.7 ; C27.2 3235.71,2058.66 3265,2029.37 3265,1915 3305,1875 3420,1875 ; 3422.5,1747.5 3813.3,1747.5 3860.8,1795 v1(3860.8,1883.75) v1(3860.8,1975) v1(3860.8,2066.25) v1(3860.8,2157.5) C1.2 ; v1(3505,1549.88) 3594.52,1549.88 C17.2 ; v1(3535.2,2151.91) v1(3535.2,2055.79) v1(3535.2,1959.67) 3535.2,1875 3420,1875 ; v1(3595,1549.88) 3688.6,1549.88 v1(3690,1549.88) v1(3780,1549.88) v1(3870,1549.88) v1(3965,1549.88) ; C24.2 C24.2@4145.31,1549.88 ; 3420,1875 3420,1590 3460.12,1549.88 3780.4,1549.88 v1(3965,1549.88) ; v1(3965,1549.88) C24.2@4145.31,1549.88 ; v1(3965,1549.88) C24.2@4145.31,1549.88
  Bottom Layer w12: U1.39 v1(3505,1549.88) ; U1.52 3469.21,1805.79 3500,1775 v2(3500,1750) 3500,1710 3660.12,1549.88 v1(3690,1549.88) ; U1.62 3492.23,2002.64 v1(3535.2,1959.67) ; U1.72 3460.51,2199.49 3490,2170 3490,2075 3509.21,2055.79 v1(3535.2,2055.79) ; v1(3535.2,2151.91) 3635.93,2151.91 3699.02,2215 U1.84 ; U1.33 3541.54,1515 3576.26,1549.73 3594.85,1549.73 v1(3595,1549.88) ; U1.32 3561.22,1491.22 3595,1525 3735,1525 3759.88,1549.88 v1(3780,1549.88) ; U1.30 3600.59,1488.04 3617.55,1505 3785,1505 3829.88,1549.88 v1(3870,1549.88) ; U1.17 3856.5,1496.5 3875,1515 3930.12,1515 v1(3965,1549.88) ; v1(3860.8,1883.75) 3922.05,1945 4083.74,1945 4140,1888.74 4140,1806.42 4180,1766.42 U1.131 ; v1(3860.8,1975) 4079,1975 4090.64,1963.36 4236.32,1963.36 U1.121 ; v1(3860.8,2066.25) 4111.25,2066.25 4171.46,2126.46 U1.108 ; v1(3860.8,2157.5) 3915.55,2212.26 U1.95 ; v1(4055,1550) 4073.03,1531.97 U1.6 ; v1(4149.49,1549.88) 4188.86,1510.51 U1.144
  Bottom Layer w40: v2(4845,2305) 5295,2305 5945,2955 5945,3355 5880,3420 v2(5797.6,3420)
MIC_ADC: MIC.1 U1.34 | length 529.7
  Bottom Layer w12: MIC.1 3085.11,1505.11 3304.89,1505.11 3345,1465 3434.7,1465 3474.7,1505 3510,1505 3521.85,1493.15 U1.34
Net1_2: 1.2 RGB.6 | length 953
  Bottom Layer w12: RGB.6 2284,2244 2284,2264 2375,2355 2375,2771 2539,2935 1.2
Net2_2: 2.2 RGB.7 | length 1225.2
  Bottom Layer w12: RGB.7 2215,2195 2215,2753.03 2491.97,3030 2.2
Net56R_2: 56R.2 PIR.2 | length 356.2
  Top Layer w12: PIR.2@3190,1165 3215,1190 3443.42,1190 3455,1201.58 56R.2
NetC4_2: C4.2 U1.23 X1.2 | length 386.4
  Top Layer w50: C4.2 3830,1177.54 3831.06,1176.48 X1.2
  Bottom Layer w12: U1.23 3738.39,1291.61 X1.2@3830,1200
NetC5_2: C5.2 U1.24 X1.1 | length 382
  Top Layer w50: X1.1 3638.94,1176.48 3640,1177.54 C5.2
  Bottom Layer w12: X1.1@3637.87,1200 3718.7,1280.83 U1.24
NetC6_2: C6.2 RST.2 U1.25 | length 2243.8
  Top Layer w12: RST.2 v2(5157.6,1218.94)
  Bottom Layer w12: U1.25 3699.02,1365 3570,1235.98 3570,1085 3645,1010 4995,1010 5155,1170 5155,1216.34 v2(5157.6,1218.94)
NetC8_2: C8.2 U1.71 | length 199.1
  Bottom Layer w12: U1.71 3365.2,2179.8 3350,2195 3350,2211.18 3388.82,2250 v1(3445,2250)
NetC9_2: C9.2 U1.106 | length 107.1
  Bottom Layer w12: U1.106 4132.09,2157.81 v1(4132.4,2157.5)
NetD1_2: MCU.2 R1.1 | length 195.5
  Top Layer w20: R1.1@5527.4,3426.36 MCU.2
NetD2_2: 3.3V.2 R2.1 | length 195.5
  Top Layer w20: R2.1@5527.4,3325.09 3.3V.2
NetD3_2: 5V.2 R3.1 | length 195.5
  Top Layer w20: R3.1@5527.4,3223.82 5V.2
NetD4_2: A.2 R4.1 | length 200.5
  Top Layer w20: R4.1 A.2
NetD5_2: B.2 R5.1 | length 200.5
  Top Layer w20: R5.1 B.2
NetD6_2: C.2 R6.1 | length 200.5
  Top Layer w20: R6.1 C.2
NetP1_1: P1.1 R8.1 | length 434.2
  Bottom Layer w12: P1.1 2505,1385 2575,1315 R8.1
NetP1_2: P1.2 Q1.3 | length 532
  Bottom Layer w12: P1.2 2345,1345 2555,1135 Q1.3
PIR: 56R.1 U1.36 | length 106.6
  Bottom Layer w12: v1(3455,1352.4) 3458.52,1352.4 3482.48,1376.36 U1.36
RGB_CLK: RGB.2 U1.74 | length 1596.4
  Top Layer w12: RGB.2 2280,2635 2380,2735 v3(2580,2735)
  Bottom Layer w12: v3(2580,2735) 2580,2585 2615.4,2549.6 2880.4,2549.6 3047.32,2382.68 3460.79,2382.68 3502.07,2341.39 3502.07,2264.54 U1.74
RGB_CS: RGB.5 U1.73 | length 1352.4
  Top Layer w12: RGB.5 2285,2335 2380,2430 v3(2585,2430)
  Bottom Layer w12: v3(2585,2430) 2950,2430 3016.54,2363.46 3446.54,2363.46 3482.48,2327.52 U1.73
RGB_GPIO1: 1.1 U1.77 | length 1193.4
  Bottom Layer w12: 1.1@2761.34,2931.06 1.1@2763.46,2931.06 ; 1.1@2762.4,2930 2780,2930 3090,2620 3405,2620 3561.22,2463.78 U1.77
RGB_GPIO2: 2.1 U1.78 | length 1322
  Bottom Layer w12: 2.1 2805,3030 2923,2912 2923,2898.4 2925,2896.4 2925,2815 3100,2640 3420,2640 3580.91,2479.09 U1.78
RGB_MISO: RGB.4 U1.75 | length 1499.8
  Top Layer w12: RGB.4 2375,2535 2580,2535 v3(2635,2590)
  Bottom Layer w12: v3(2635,2590) 2885,2590 3070,2405 3473.13,2405 3521.94,2356.19 3521.94,2264.54 U1.75
RGB_MOSI: RGB.3 U1.76 | length 1519.4
  Top Layer w12: RGB.3 2295,2535 2395,2635 v3(2615,2635)
  Bottom Layer w12: v3(2615,2635) 2880,2635 3085,2430 3475,2430 3541.54,2363.46 U1.76
SDIO_CK: TF.5 U1.113 | length 1644.9
  Bottom Layer w12: U1.113 4355.75,2120.75 5260,3025 5260,3182.4 5237.4,3205 TF.5
SDIO_CMD: TF.3 U1.116 | length 1645.9
  Top Layer w12: v2(5175,3115) 5270,3115 5290,3095 v2(5290,3030)
  Bottom Layer w12: U1.116 4236.51,2061.79 4326.79,2061.79 5290,3025 v2(5290,3030)
SDIO_D0: TF.7 U1.98 | length 2495
  Bottom Layer w12: U1.98 3974.51,2264.54 3974.51,2521.38 4445,2991.87 4445,3350 4570,3475 5295,3475 5320,3450 5320,3325 5290,3295 TF.7
SDIO_D1: TF.8 U1.99 | length 1929.9
  Bottom Layer w12: U1.99 3994.29,2514.29 4470,2990 4470,3250 4560,3340 TF.8
SDIO_D2: TF.1 U1.111 | length 1324
  Top Layer w12: v2(5055,2940) 5060,2940 5145,3025 v2@5170,3025
  Bottom Layer w12: U1.111 4330.12,2160.12 5055,2885 v2(5055,2940)
  other v2: 5177.6,3023.64
SDIO_D3: TF.2 U1.112 | length 1416
  Bottom Layer w12: U1.112 4236.51,2140.53 4340.53,2140.53 5083,2883 5083,2951.6 5080,2954.6 5080,3025 5125,3070 TF.2
SPI3_CS: SPI3.5 U1.132 | length 1965.4
  Top Layer w12: v2(4320,1775) 4415,1775 5200,2560 SPI3.5
  Bottom Layer w12: U1.132 4290,1746.73 4318.27,1775 v2(4320,1775)
SPI3_MISO: SPI3.4 U1.134 | length 1940.3
  Top Layer w12: v2(4440,1735) 5165,2460 SPI3.4
  Bottom Layer w12: U1.134 4412.36,1707.36 v2(4440,1735)
SPI3_MOSI: SPI3.3 U1.135 | length 1918.7
  Top Layer w12: v2(4445,1673.77) 4631.23,1860 4820,1860 5320,2360 SPI3.3
  Bottom Layer w12: U1.135 4236.51,1687.77 4372.23,1687.77 4386.23,1673.77 v2(4445,1673.77)
SPI3_SCK: SPI3.2 U1.133 | length 1893.7
  Top Layer w12: v2(4565,1727.05) 4678.95,1841 4827.87,1841 5246.87,2260 SPI3.2
  Bottom Layer w12: U1.133 4340,1727.05 4392.95,1780 4512.97,1780 4520,1772.97 4520,1772.05 v2(4565,1727.05)
SWCLK: SWD.2 U1.109 | length 1053.7
  Bottom Layer w12: U1.109 4290,2199.49 4375,2284.49 4375,2470 4685,2780 SWD.2
SWDIO: SWD.3 U1.105 | length 1317.8
  Bottom Layer w12: U1.105 4112.4,2397.4 4510,2795 4510,3085 4555,3130 4691,3130 SWD.3
TFT_BLK: TFT.7 U1.46 | length 1467.2
  Bottom Layer w12: TFT.7 2487.34,2374.07 2487.34,2335.15 2680,2142.49 2680,1767.4 2759.72,1687.68 U1.46
TFT_CLK: TFT.3 U1.41 | length 1220.7
  Bottom Layer w12: TFT.3 2560,1901.42 2560,1695 2665.75,1589.25 U1.41
TFT_CS1: TFT.9 U1.47 | length 1637
  Bottom Layer w12: TFT.9 2521.27,2540.15 2521.27,2328.09 2701,2148.36 2701,1784 2777.64,1707.36 U1.47
TFT_CS2: TFT.10 U1.48 | length 1699.6
  Bottom Layer w12: TFT.10 2478.74,2642.82 2550,2571.56 2550,2340 2720,2170 2720,1815 2807.95,1727.05 U1.48
TFT_DC: TFT.6 U1.45 | length 1428.9
  Bottom Layer w12: TFT.6 2478.74,2261.26 2647.5,2092.5 2647.5,1771.27 2750.77,1667.99 U1.45@3378.82,1667.99 ; U1.45@3378.82,1667.99 U1.45 U1.45@3378.82,1667.98
TFT_MISO: TFT.8 U1.42 | length 1765.7
  Bottom Layer w12: TFT.8 2472.42,2476.36 2461.36,2476.36 2425,2440 2425,2066.36 2456.36,2035 2490,2035 2585,1940 2585,1700 2676.06,1608.94 U1.42
TFT_MOSI: TFT.4 U1.43 | length 1265.5
  Bottom Layer w12: TFT.4 2492.32,2082.68 2605,1970 2605,1730 2706.38,1628.62 U1.43
TFT_PEN: TFT.11 U1.40 | length 2126
  Bottom Layer w12: TFT.11 2405,2708.94 2405,1985 2450,1940 2481.56,1940 2536.56,1885 2536.56,1688.44 2655.43,1569.57 U1.40
TFT_RES: TFT.5 U1.44 | length 1337.5
  Bottom Layer w12: TFT.5 2496.77,2182.68 2625,2054.45 2625,1748.31 2725,1648.31 U1.44
UART6_RX: U1.97 UART6.3 | length 904
  Bottom Layer w12: U1.97 3954.92,2569.92 4220,2835 4220,2960 4260.89,3000.89 4260.89,3035.89 UART6.3
UART6_TX: U1.96 UART6.2 | length 870.9
  Bottom Layer w12: U1.96 3935.24,2609.76 3935,2610 4120,2795 4120,2962.97 4159.41,3002.38 4159.41,3034.41 UART6.2
pads on no net: GY-39_JP.1 MIC.4 MPU.5 MPU.6 MPU.7 MPU.8 MPU.9 MPU.10 TF.0 TF.9 TF.10 U1.1 U1.2 U1.3 U1.4 U1.5 U1.7 U1.8 U1.9 U1.10 U1.11 U1.12 U1.13 U1.14 U1.15 U1.18 U1.19 U1.20 U1.21 U1.22 U1.26 U1.27 U1.28 U1.29 U1.35 U1.37 U1.49 U1.50 U1.53 U1.54 U1.55 U1.56 U1.57 U1.58 U1.59 U1.60 U1.63 U1.64 U1.65 U1.66 U1.67 U1.68 U1.85 U1.86 U1.91 U1.92 U1.93 U1.100 U1.101 U1.102 U1.103 U1.104 U1.114 U1.115 U1.125 U1.141 U1.142 U1.143

## Polygon pours and split planes (outlines as drawn)
GND on Bottom Layer "Top Layer-GND" (solid, pour order 7): 2170,950.94 2170,3510 6107.01,3510 6107.01,951.89
GND on Top Layer "Top Layer-GND" (solid, pour order 6): 2170,950.94 2170,3510 6107.01,3510 6107.01,951.89

## Keep-outs
Keep-Out Layer:
  the board outline again, w10

## Silkscreen, mask and mechanical layers (free items; w line width, h text height)
Top Overlay:
  lines w10: 2291.93,973.86 2291.93,1405 3240,1405 3240,976.93 ; 2295.12,973.86 3240,973.86 ; 4318.25,2955.55 3334,2955.55 3334,2365 4319,2365 4319,2955.55 ; 4765.2,2796.18 4765.2,1745 5721.89,1745 ; 4768.5,2800 5725.2,2800 5725.2,1748.82
  lines w30: 2400,1435 2400,3127.91 5249.88,3127.91 5249.88,1435 2400,1435
Bottom Overlay:
  lines w10: 4435,1585 4435,1033.82 5407.44,1033.82 ; 4435,1586.18 5407.44,1586.18 5407.44,1035

## Text inside footprints (layer, text, board x,y; h text height)
GPIO: Bottom Overlay "1" at 2870,3360 h50 r180; Bottom Overlay "2" at 2850,3260 h50 r180; Bottom Overlay "14" at 3610,3260 h50 r180; Bottom Overlay "13" at 3610,3360 h50 r180
ISP: Bottom Overlay "1" at 4539,1425 h50; Bottom Overlay "2" at 4449,1425 h50; Bottom Overlay "7" at 4555,1147 h50; Bottom Overlay "8" at 4447,1147 h50
P1: Bottom Overlay "+" at 2650,1530 h60